# Altium PCB ESP32PCB.PcbDoc (part 2 of 3)
Units mil, origin at the board's own origin, x right, y up, seen from the top; angles counter-clockwise.
Board outline 2685 x 1054.88 mil, 4 copper layers (L1, L2, L3, L4), stack 52.058 mil thick; 64 components, 73 nets, 299 pads, 160 vias.
Unrouted connection lines stored in the file: 2.
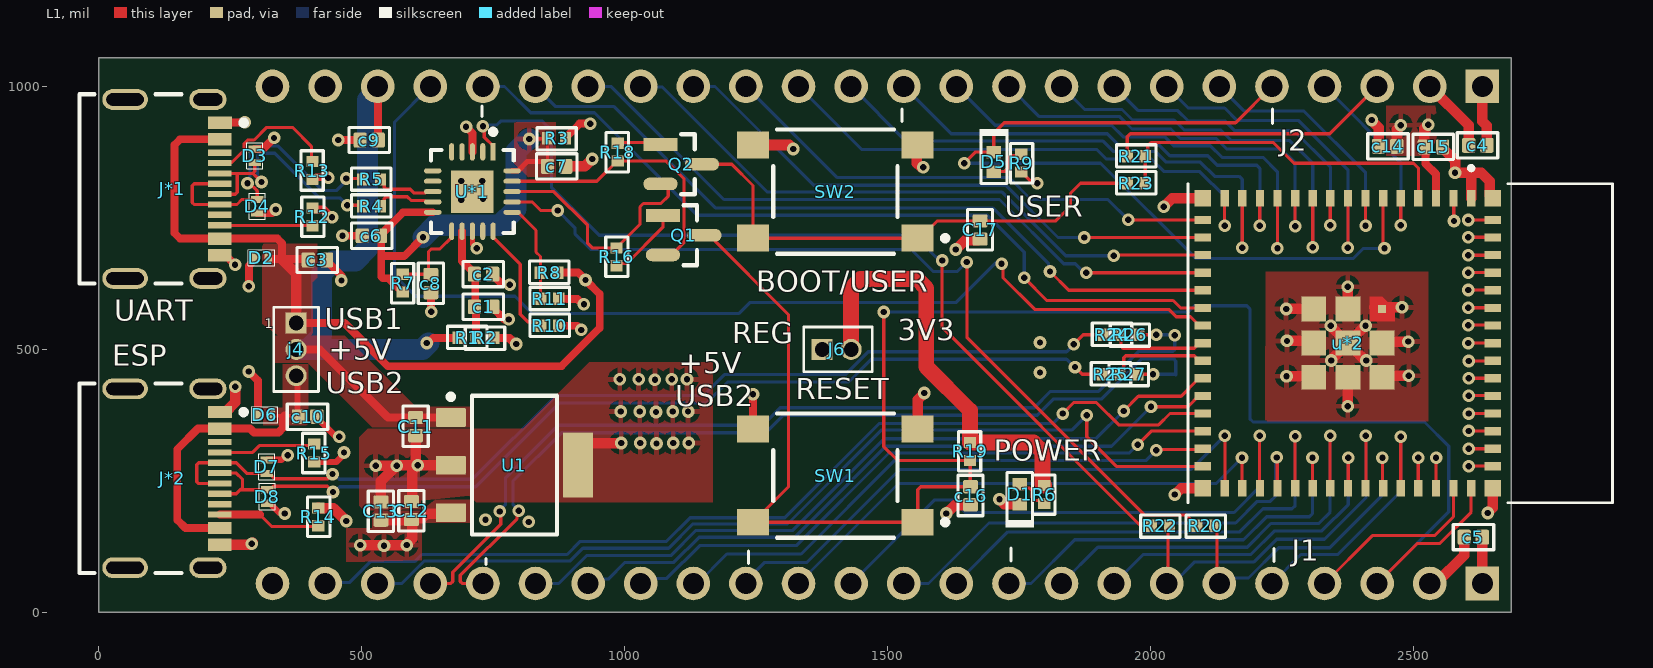
[diagram p0: L1 view]

## Part data (continued)
R6 R9: library part RC0402FR-071KL, "RES 1K OHM 1% 1/16W 0402", Case Code (Imperial)=0402, LCSC Part Number=C106235, Manufacturer="Yageo Group", Max Operating Temperature=155°C, Min Operating Temperature=-55°C, Power Rating=62.5mW, Supplier Part Number=311-1.00KLRDKR-ND, Temperature Coefficient=100ppm/°C, Tolerance=1%, Voltage Rating=50V, Case Code (Metric)=0402, Case/Package=0402, Category="Chip SMD Resistors", China RoHS=Non-Compliant, ComponentLink1Description=https://datasheet.octopart.com:443/RC0402FR-071KL-Yageo-datasheet-175887523.pdf?src-supplier=Newark, ComponentLink1URL=https://datasheet.octopart.com:443/RC0402FR-071KL-Yageo-datasheet-175887523.pdf?src-supplier=Newark, ComponentLink2Description=https://datasheet.octopart.com:443/RC0402FR-071KL-Yageo-datasheet-10408619.pdf?src-supplier=Newark, ComponentLink2URL=https://datasheet.octopart.com:443/RC0402FR-071KL-Yageo-datasheet-10408619.pdf?src-supplier=Newark, ComponentLink3Description=https://datasheet.octopart.com:443/RC0402FR-071KL-Yageo-datasheet-8324527.pdf?src-supplier=Newark, ComponentLink3URL=https://datasheet.octopart.com:443/RC0402FR-071KL-Yageo-datasheet-8324527.pdf?src-supplier=Newark, ComponentLink4Description=https://datasheet.octopart.com:443/RC0402FR-071KL-Yageo-datasheet-164759695.pdf?src-supplier=Upverter, ComponentLink4URL=https://datasheet.octopart.com:443/RC0402FR-071KL-Yageo-datasheet-164759695.pdf?src-supplier=Upverter, ComponentLink5Description=https://datasheet.octopart.com:443/RC0402FR-071KL-Yageo-datasheet-103092701.pdf?src-supplier=Upverter, ComponentLink5URL=https://datasheet.octopart.com:443/RC0402FR-071KL-Yageo-datasheet-103092701.pdf?src-supplier=Upverter, ComponentLink6Description=https://sigma.octopart.com:443/138820526/technical_drawing/Yageo-RC0402FR-071KL.pdf?src-supplier=Upverter, ComponentLink6URL=https://sigma.octopart.com:443/138820526/technical_drawing/Yageo-RC0402FR-071KL.pdf?src-supplier=Upverter, ComponentLink7Description=https://datasheet.octopart.com:443/RC0402FR-071KL-Yageo-datasheet-98239111.pdf?src-supplier=Upverter, ComponentLink7URL=https://datasheet.octopart.com:443/RC0402FR-071KL-Yageo-datasheet-98239111.pdf?src-supplier=Upverter, ComponentLink8Description=https://datasheet.octopart.com:443/RC0402FR-071KL-Yageo-Group-datasheet-190305687.pdf?src-supplier=Future+Electronics, ComponentLink8URL=https://datasheet.octopart.com:443/RC0402FR-071KL-Yageo-Group-datasheet-190305687.pdf?src-supplier=Future+Electronics, ComponentLink9Description=https://datasheet.octopart.com:443/RC0402FR-071KL-Yageo-datasheet-12531192.pdf?src-supplier=Future+Electronics, ComponentLink9URL=https://datasheet.octopart.com:443/RC0402FR-071KL-Yageo-datasheet-12531192.pdf?src-supplier=Future+Electronics, ComponentLink10Description=https://datasheet.octopart.com:443/RC0402FR-071KL-Yageo-datasheet-137700087.pdf?src-supplier=Future+Electronics, ComponentLink10URL=https://datasheet.octopart.com:443/RC0402FR-071KL-Yageo-datasheet-137700087.pdf?src-supplier=Future+Electronics, ComponentLink11Description=https://datasheet.octopart.com:443/RC0402FR-071KL-Yageo-datasheet-8324255.pdf?src-supplier=Future+Electronics, ComponentLink11URL=https://datasheet.octopart.com:443/RC0402FR-071KL-Yageo-datasheet-8324255.pdf?src-supplier=Future+Electronics, ComponentLink12Description=https://datasheet.octopart.com:443/RC0402FR-071KL-Yageo-datasheet-62067350.pdf?src-supplier=Farnell, ComponentLink12URL=https://datasheet.octopart.com:443/RC0402FR-071KL-Yageo-datasheet-62067350.pdf?src-supplier=Farnell, ComponentLink13Description=https://datasheet.octopart.com:443/RC0402FR-071KL-Yageo-datasheet-8329306.pdf?src-supplier=element14, ComponentLink13URL=https://datasheet.octopart.com:443/RC0402FR-071KL-Yageo-datasheet-8329306.pdf?src-supplier=element14, ComponentLink14Description=https://datasheet.octopart.com:443/RC0402FR-071KL-Yageo-datasheet-505231.pdf?src-supplier=element14, ComponentLink14URL=https://datasheet.octopart.com:443/RC0402FR-071KL-Yageo-datasheet-505231.pdf?src-supplier=element14, ComponentLink15Description=https://datasheet.octopart.com:443/RC0402FR-071KL-Yageo-datasheet-175423674.pdf?src-supplier=SOS+electronic, ComponentLink15URL=https://datasheet.octopart.com:443/RC0402FR-071KL-Yageo-datasheet-175423674.pdf?src-supplier=SOS+electronic, ComponentLink16Description=https://datasheet.octopart.com:443/RC0402FR-071KL-Yageo-datasheet-148775077.pdf?src-supplier=TME, ComponentLink16URL=https://datasheet.octopart.com:443/RC0402FR-071KL-Yageo-datasheet-148775077.pdf?src-supplier=TME, ComponentLink17Description=https://datasheet.octopart.com:443/RC0402FR-071KL-Yageo-datasheet-79472498.pdf?src-supplier=Megastar, ComponentLink17URL=https://datasheet.octopart.com:443/RC0402FR-071KL-Yageo-datasheet-79472498.pdf?src-supplier=Megastar, ComponentLink18Description=https://datasheet.octopart.com/RC0402FR-071KL-Yageo-datasheet-73766026.pdf, ComponentLink18URL=https://datasheet.octopart.com/RC0402FR-071KL-Yageo-datasheet-73766026.pdf, ComponentLink19Description=http://sigma.octopart.com:80/conflict_mineral_statement/Yageo-company-3.pdf?src-supplier=Compliance+Statements, ComponentLink19URL=http://sigma.octopart.com:80/conflict_mineral_statement/Yageo-company-3.pdf?src-supplier=Compliance+Statements, ComponentLink20Description=http://sigma.octopart.com:80/rohs_statement/Yageo-company-2.pdf?src-supplier=Compliance+Statements, ComponentLink20URL=http://sigma.octopart.com:80/rohs_statement/Yageo-company-2.pdf?src-supplier=Compliance+Statements, Composition="Thick Film", Contact Plating=Tin, Depth=500µm, Height=350µm, Lead Free="Lead Free", Length=1mm, Lifecycle Status=Production, Manufacturer Part Number=RC0402FR-071KL, Military Standard=Not, Mounting Technology="Surface Mount", Number of Terminals=2, Packaging="Tape & Reel", Pins=2, Pricing="1=0.1, 10=0.021, 25=0.0152, 50=0.012, 100=0.0097, 250=0.0074, 500=0.00612, 1000=0.00512, 5000=0.00355 (USD)", Radiation Hardening=No, REACH SVHC=Yes, RoHS=Compliant, Schedule B="8533210045, 8533210045|8533210045|8533210045|8533210045|8533210045|8533210045|8533210045|8533210045|8533210045|8533210045|8533210045|8533210045|8533210045|8533210045|8533210045|8533210045|8533210045|8533210045|8533210045|8533210045|8533210045|8533210045|8533210045|85", Stock=9104095, Supplier=DigiKey, Termination=SMD/SMT, Voltage Rating (AC)=50V, Voltage Rating (DC)=50V, Width=500µm, Working Voltage=50V
R8: library part RC0402FR-074K7L, "RES 4.7K OHM 1% 1/16W 0402", Case/Package=0402, LCSC Part Number=C105871, Manufacturer=Yageo, Max Operating Temperature=155°C, Min Operating Temperature=-55°C, Package Height=0.35mm, Package Length=1mm, Package Shape=Rectangular, Package Style=SMTMeter, Package Width=0.5mm, Power=62.5mW, Rated Temperature=70°C, Resistor Type="FIXED RESISTOR", Supplier Part Number=311-4.7KLRCT-ND, Temperature Coefficient=100ppm/°C, Tolerance=1%, Working Voltage=50V, Additional Feature="LASER TRIMMABLE", Category="Chip SMD Resistors", ComponentLink1Description=https://datasheet.ciiva.com:443/pdfs/VipMasterIC/IC/YAGO/YAGO-S-A0008145938/YAGO-S-A0008145938-1.pdf?src-supplier=IHS+Markit, ComponentLink1URL=https://datasheet.ciiva.com:443/pdfs/VipMasterIC/IC/YAGO/YAGO-S-A0008145938/YAGO-S-A0008145938-1.pdf?src-supplier=IHS+Markit, ComponentLink2Description=https://datasheet.ciiva.com/22661/1686128-22661342.pdf?src-supplier=Element14, ComponentLink2URL=https://datasheet.ciiva.com/22661/1686128-22661342.pdf?src-supplier=Element14, ComponentLink3Description=https://datasheet.ciiva.com/7850/1018594-7850022.pdf?src-supplier=Element14, ComponentLink3URL=https://datasheet.ciiva.com/7850/1018594-7850022.pdf?src-supplier=Element14, ComponentLink4Description=https://datasheet.ciiva.com/7850/1018594-7850023.pdf?src-supplier=Element14, ComponentLink4URL=https://datasheet.ciiva.com/7850/1018594-7850023.pdf?src-supplier=Element14, ComponentLink5Description=https://datasheet.ciiva.com/15215/getdatasheetpartid-328119-15215035.pdf?src-supplier=Verical, ComponentLink5URL=https://datasheet.ciiva.com/15215/getdatasheetpartid-328119-15215035.pdf?src-supplier=Verical, Construction=Chip, JESD-609 Code=e3, Manufacturer Part Number=RC0402FR-074K7L, Mounting Technology="Surface Mount", Packaging="Tape and Reel", Pins=2, Pricing="1=0.1, 10=0.015, 50=0.0088, 100=0.0073, 500=0.00488, 1000=0.00417, 5000=0.00297 (USD)", Reach SVHC Compliant=Yes, RoHS=Yes, RoHS Compliant=Yes, Stock=9886878, Supplier=Digikey, Technology="METAL GLAZE/THICK FILM", Terminal Finish=Nickel, Termination=Wraparound
R10 R11 R16 R18 R19: library part AC0402FR-0710KL, "RES SMD 10K OHM 1% 1/16W 0402", Case Code (Imperial)=0402, Case Code (Metric)=1005, LCSC Part Number=C144807, Manufacturer="Yageo Group", Max Operating Temperature=155°C, Max Power Dissipation=63mW, Min Operating Temperature=-55°C, Power Rating=62.5mW, Ratings=AEC-Q200, Supplier Part Number=YAG3436CT-ND, Temperature Coefficient=100ppm/°C, Tolerance=1%, Voltage Rating=50V, Case/Package=0402, Category="Chip SMD Resistors", China RoHS=Non-Compliant, ComponentLink1Description=https://datasheet.octopart.com:443/AC0402FR-0710KL-Yageo-datasheet-182189377.pdf?src-supplier=IHS, ComponentLink1URL=https://datasheet.octopart.com:443/AC0402FR-0710KL-Yageo-datasheet-182189377.pdf?src-supplier=IHS, ComponentLink2Description=https://datasheet.octopart.com:443/AC0402FR-0710KL-Yageo-datasheet-83209224.pdf?src-supplier=Upverter, ComponentLink2URL=https://datasheet.octopart.com:443/AC0402FR-0710KL-Yageo-datasheet-83209224.pdf?src-supplier=Upverter, ComponentLink3Description=https://datasheet.octopart.com:443/AC0402FR-0710KL-Yageo-datasheet-178509465.pdf?src-supplier=Newark, ComponentLink3URL=https://datasheet.octopart.com:443/AC0402FR-0710KL-Yageo-datasheet-178509465.pdf?src-supplier=Newark, ComponentLink4Description=https://datasheet.octopart.com:443/AC0402FR-0710KL-Yageo-datasheet-166720450.pdf?src-supplier=JRH+Electronics, ComponentLink4URL=https://datasheet.octopart.com:443/AC0402FR-0710KL-Yageo-datasheet-166720450.pdf?src-supplier=JRH+Electronics, ComponentLink5Description=https://datasheet.octopart.com:443/AC0402FR-0710KL-Yageo-datasheet-151884373.pdf?src-supplier=Future+Electronics, ComponentLink5URL=https://datasheet.octopart.com:443/AC0402FR-0710KL-Yageo-datasheet-151884373.pdf?src-supplier=Future+Electronics, ComponentLink6Description=https://datasheet.octopart.com:443/AC0402FR-0710KL-Yageo-Group-datasheet-189830439.pdf?src-supplier=Future+Electronics, ComponentLink6URL=https://datasheet.octopart.com:443/AC0402FR-0710KL-Yageo-Group-datasheet-189830439.pdf?src-supplier=Future+Electronics, ComponentLink7Description=https://datasheet.octopart.com:443/AC0402FR-0710KL-Yageo-datasheet-137699919.pdf?src-supplier=Future+Electronics, ComponentLink7URL=https://datasheet.octopart.com:443/AC0402FR-0710KL-Yageo-datasheet-137699919.pdf?src-supplier=Future+Electronics, ComponentLink8Description=https://datasheet.octopart.com:443/AC0402FR-0710KL-Yageo-datasheet-24580492.pdf?src-supplier=Future+Electronics, ComponentLink8URL=https://datasheet.octopart.com:443/AC0402FR-0710KL-Yageo-datasheet-24580492.pdf?src-supplier=Future+Electronics, ComponentLink9Description=https://datasheet.octopart.com:443/AC0402FR-0710KL-Yageo-datasheet-13029202.pdf?src-supplier=Future+Electronics, ComponentLink9URL=https://datasheet.octopart.com:443/AC0402FR-0710KL-Yageo-datasheet-13029202.pdf?src-supplier=Future+Electronics, ComponentLink10Description=https://datasheet.octopart.com/AC0402FR-0710KL-Yageo-datasheet-12512238.pdf, ComponentLink10URL=https://datasheet.octopart.com/AC0402FR-0710KL-Yageo-datasheet-12512238.pdf, ComponentLink11Description=https://datasheet.octopart.com:443/AC0402FR-0710KL-Yageo-Group-datasheet-164768995.pdf?src-supplier=ODG+(Origin+Data+Global), ComponentLink11URL=https://datasheet.octopart.com:443/AC0402FR-0710KL-Yageo-Group-datasheet-164768995.pdf?src-supplier=ODG+(Origin+Data+Global), ComponentLink12Description=https://datasheet.octopart.com:443/AC0402FR-0710KL-Yageo-datasheet-128677448.pdf?src-supplier=X-ON, ComponentLink12URL=https://datasheet.octopart.com:443/AC0402FR-0710KL-Yageo-datasheet-128677448.pdf?src-supplier=X-ON, ComponentLink13Description=http://sigma.octopart.com:80/conflict_mineral_statement/Yageo-company-3.pdf?src-supplier=Compliance+Statements, ComponentLink13URL=http://sigma.octopart.com:80/conflict_mineral_statement/Yageo-company-3.pdf?src-supplier=Compliance+Statements, ComponentLink14Description=http://sigma.octopart.com:80/rohs_statement/Yageo-company-2.pdf?src-supplier=Compliance+Statements, ComponentLink14URL=http://sigma.octopart.com:80/rohs_statement/Yageo-company-2.pdf?src-supplier=Compliance+Statements, Composition="Thick Film", Country of Origin="Mainland China, Taiwan", Depth=500µm, Export Control Classification Number (ECCN) Code=EAR99, Features="Automotive AEC-Q200, Moisture Resistant", Harmonized Tariff Schedule (HTS) Code=8533.21.00.30, Height=320µm, Introduction Date=2012-04-10, Lead Free="Lead Free", Length=1mm, Lifecycle Status=Production, Manufacturer Part Number=AC0402FR-0710KL, Military Standard=Not, Mounting Technology="Surface Mount", Number of Terminals=2, Number of Terminations=2, Packaging="Tape & Reel", Pricing="1=0.1, 10=0.024, 25=0.0176, 50=0.014, 100=0.0114, 250=0.00876, 500=0.00726, 1000=0.00612, 5000=0.00431 (USD)", REACH SVHC=Yes, RoHS=Compliant, Schedule B="8533210045, 8533210045|8533210045|8533210045|8533210045|8533210045|8533210045|8533210045|8533210045|8533210045|8533210045|8533210045|8533210045|8533210045|8533210045|8533210045|8533210045|8533210045|8533210045|8533210045, 8533210045|8533210045|8533210045|8533210045|8533210045|8533210045|8533210045|8533210045|8533210045|8533210045|8533210045|8533210045|8533210045|8533210045|8533210045|8533210045|8533210045|8533210045|8533210045|8533210045|8533210045|8533210045|8533210045|85", Stock=147026, Supplier=DigiKey, Termination=SMD/SMT, Width=500µm, Working Voltage=50V
R12 R13 R14 R15: library part AC0402FR-135K1L, "Res Thick Film 0402 5.1K Ohm 1% 0.063W(1/16W) ±100ppm/°C Pad SMD T/R Automotive AEC-Q200", Case/Package=0402, LCSC Part Number=C226739, Manufacturer="Yageo Group", Max Operating Temperature=155°C, Min Operating Temperature=-55°C, Power Rating=62.5mW, Ratings=AEC-Q200, Supplier Part Number=13-AC0402FR-135K1LDKR-ND, Temperature Coefficient=100ppm/°C, Tolerance=1%, Voltage Rating=50V, Category="Chip SMD Resistors", China RoHS=Non-Compliant, ComponentLink1Description=https://datasheet.octopart.com:443/AC0402FR-135K1L-Yageo-datasheet-182189377.pdf?src-supplier=IHS, ComponentLink1URL=https://datasheet.octopart.com:443/AC0402FR-135K1L-Yageo-datasheet-182189377.pdf?src-supplier=IHS, ComponentLink2Description=https://datasheet.octopart.com:443/AC0402FR-135K1L-Yageo-datasheet-83209224.pdf?src-supplier=Upverter, ComponentLink2URL=https://datasheet.octopart.com:443/AC0402FR-135K1L-Yageo-datasheet-83209224.pdf?src-supplier=Upverter, ComponentLink3Description=https://datasheet.octopart.com:443/AC0402FR-135K1L-Yageo-Group-datasheet-189830439.pdf?src-supplier=Future+Electronics, ComponentLink3URL=https://datasheet.octopart.com:443/AC0402FR-135K1L-Yageo-Group-datasheet-189830439.pdf?src-supplier=Future+Electronics, ComponentLink4Description=https://datasheet.octopart.com:443/AC0402FR-135K1L-Yageo-datasheet-166720450.pdf?src-supplier=Future+Electronics, ComponentLink4URL=https://datasheet.octopart.com:443/AC0402FR-135K1L-Yageo-datasheet-166720450.pdf?src-supplier=Future+Electronics, ComponentLink5Description=https://datasheet.octopart.com:443/AC0402FR-135K1L-Yageo-datasheet-164768995.pdf?src-supplier=Future+Electronics, ComponentLink5URL=https://datasheet.octopart.com:443/AC0402FR-135K1L-Yageo-datasheet-164768995.pdf?src-supplier=Future+Electronics, ComponentLink6Description=https://datasheet.octopart.com/AC0402FR-135K1L-Yageo-datasheet-12512238.pdf, ComponentLink6URL=https://datasheet.octopart.com/AC0402FR-135K1L-Yageo-datasheet-12512238.pdf, ComponentLink7Description=http://sigma.octopart.com:80/conflict_mineral_statement/Yageo-company-3.pdf?src-supplier=Compliance+Statements, ComponentLink7URL=http://sigma.octopart.com:80/conflict_mineral_statement/Yageo-company-3.pdf?src-supplier=Compliance+Statements, ComponentLink8Description=http://sigma.octopart.com:80/rohs_statement/Yageo-company-2.pdf?src-supplier=Compliance+Statements, ComponentLink8URL=http://sigma.octopart.com:80/rohs_statement/Yageo-company-2.pdf?src-supplier=Compliance+Statements, Composition="Thick Film", Country of Origin="Mainland China, Taiwan", Export Control Classification Number (ECCN) Code=EAR99, Harmonized Tariff Schedule (HTS) Code=8533.21.00.30, Height=320µm, Introduction Date=2012-04-10, Length=1mm, Lifecycle Status=Production, Manufacturer Part Number=AC0402FR-135K1L, Mounting Technology="Surface Mount", Number of Terminals=2, Packaging="Tape & Reel", Pricing="1=0.1, 10=0.024, 25=0.0176, 50=0.014, 100=0.0114, 250=0.00876, 500=0.00726, 1000=0.00612, 5000=0.00431 (USD)", REACH SVHC=Yes, RoHS=Compliant, Stock=116046, Supplier=DigiKey, Width=500µm, Working Voltage=50V
SW1 SW2: "SWITCH TACTILE SPST-NO 0.05A 12V", Case/Package=SMD/SMT, Color=Black, Contact Current Rating=50mA, Contact Resistance=100mΩ, Insulation Resistance=100GΩ, LCSC Part Number=C221869, Manufacturer="C&K Components", Max Operating Temperature=60°C, Max Voltage Rating (DC)=12V, Min Operating Temperature=-20°C, Operating Force=1.96N, Supplier Part Number=CKN9085CT-ND, Actuator Material="Nylon, Polyamide", Category="Tactile Switches", ComponentLink1Description=https://datasheet.octopart.com:443/PTS645SH50SMTR92LFS-C%26K-Components-datasheet-169841344.pdf?src-supplier=Farnell, ComponentLink1URL=https://datasheet.octopart.com:443/PTS645SH50SMTR92LFS-C%26K-Components-datasheet-169841344.pdf?src-supplier=Farnell, ComponentLink2Description=https://datasheet.octopart.com:443/PTS645SH50SMTR92LFS-C%26K-Components-datasheet-165782998.pdf?src-supplier=Farnell, ComponentLink2URL=https://datasheet.octopart.com:443/PTS645SH50SMTR92LFS-C%26K-Components-datasheet-165782998.pdf?src-supplier=Farnell, ComponentLink3Description=https://datasheet.octopart.com:443/PTS645SH50SMTR92LFS-C%26K-Components-datasheet-67873720.pdf?src-supplier=Upverter, ComponentLink3URL=https://datasheet.octopart.com:443/PTS645SH50SMTR92LFS-C%26K-Components-datasheet-67873720.pdf?src-supplier=Upverter, ComponentLink4Description=https://datasheet.octopart.com:443/PTS645SH50SMTR92-LFS-C%26K-Components-datasheet-141421486.pdf?src-supplier=Upverter, ComponentLink4URL=https://datasheet.octopart.com:443/PTS645SH50SMTR92-LFS-C%26K-Components-datasheet-141421486.pdf?src-supplier=Upverter, ComponentLink5Description=https://datasheet.octopart.com:443/PTS645SH50SMTR92-LFS-C%26K-Components-datasheet-110647872.pdf?src-supplier=TME, ComponentLink5URL=https://datasheet.octopart.com:443/PTS645SH50SMTR92-LFS-C%26K-Components-datasheet-110647872.pdf?src-supplier=TME, ComponentLink6Description=https://datasheet.octopart.com:443/PTS645SH50SMTR-92-LFS-C%26K-Components-datasheet-150821959.pdf?src-supplier=TME, ComponentLink6URL=https://datasheet.octopart.com:443/PTS645SH50SMTR-92-LFS-C%26K-Components-datasheet-150821959.pdf?src-supplier=TME, ComponentLink7Description=https://datasheet.octopart.com:443/PTS645SH50SMTR92LFS-C%26K-Components-datasheet-138128951.pdf?src-supplier=Future+Electronics, ComponentLink7URL=https://datasheet.octopart.com:443/PTS645SH50SMTR92LFS-C%26K-Components-datasheet-138128951.pdf?src-supplier=Future+Electronics, ComponentLink8Description=https://datasheet.octopart.com:443/PTS645SH50SMTR92LFS-C%26K-Components-datasheet-62111174.pdf?src-supplier=Future+Electronics, ComponentLink8URL=https://datasheet.octopart.com:443/PTS645SH50SMTR92LFS-C%26K-Components-datasheet-62111174.pdf?src-supplier=Future+Electronics, ComponentLink9Description=https://datasheet.octopart.com:443/PTS645SH50SMTR92LFS-C%26K-Components-datasheet-24578962.pdf?src-supplier=Future+Electronics, ComponentLink9URL=https://datasheet.octopart.com:443/PTS645SH50SMTR92LFS-C%26K-Components-datasheet-24578962.pdf?src-supplier=Future+Electronics, ComponentLink10Description=https://datasheet.octopart.com:443/PTS645SH50SMTR92-LFS-C%26K-Components-datasheet-12590747.pdf?src-supplier=Future+Electronics, ComponentLink10URL=https://datasheet.octopart.com:443/PTS645SH50SMTR92-LFS-C%26K-Components-datasheet-12590747.pdf?src-supplier=Future+Electronics, Contact Material=Bronze, Contact Plating=Silver, Country of Origin="Mainland China", Current Rating=50mA, Depth=9mm, Electrical Life=100kcycles, Export Control Classification Number (ECCN) Code=EAR99, Harmonized Tariff Schedule (HTS) Code=8536.50.90.40, Height=3.4544mm, Illumination Type="Illuminated, Non-Illuminated", Introduction Date=2013-05-01, Lead Free="Lead Free", Length=6mm, Life (Cycles)=100kcycles, Lifecycle Status=Production, Manufacturer Part Number=PTS645SH50SMTR92LFS, Max Current Rating=50mA, Mechanical Life=100kcycles, Mounting Technology="Surface Mount", Number of Positions=1, Orientation=Straight, Packaging="Tape & Reel (TR)", Pricing="1=0.36, 10=0.312, 25=0.2912, 100=0.2606, 250=0.24148, 500=0.2279 (USD)", REACH SVHC=Yes, RoHS=Compliant, Stock=46479, Supplier=DigiKey, Switch Function=Off-Mom, Termination="Gull Wing", Throw Configuration=SPST, Voltage Rating (DC)=12V
U1: "IC REG LIN 3.3V 1.5A SOT-223-4", Case/Package=SOT-223, Dropout Voltage=340mV, Input Bias Current=1mA, LCSC Part Number=C181262, Manufacturer="Texas Instruments", Manufacturer Lifecycle Status=ACTIVE, Max Operating Temperature=125°C, Max Output current=1.5A, Max Output Voltage=3.3V, Max Supply Voltage=20V, Min Current Limit=1.6A, Min Input Voltage=2.1V, Min Operating Temperature=-40°C, Supplier Part Number=296-24897-1-ND, Accuracy=3%, Category="LDO Voltage Regulators", ComponentLink1Description=https://datasheet.octopart.com:443/TL1963A-33DCYR-Texas-Instruments-datasheet-36835243.pdf?src-supplier=Texas+Instruments, ComponentLink1URL=https://datasheet.octopart.com:443/TL1963A-33DCYR-Texas-Instruments-datasheet-36835243.pdf?src-supplier=Texas+Instruments, ComponentLink2Description=https://octopart.com:443/opatz8j6/c1?t=FTrSVOfP93nAUGvhjd3lhUGXAEiGpl01rJ-ejAqOdcBDFpYGu16XhNrkZ_g2C1wXYKFanKCfwKRpWqlBzC_IHFKOGMjjJUz2d1twI7R59KZfH-bxvJsXWw8-WulKPBbWwnOyaMw2-C-0Sp5V4W6xJGBv4vK90Jv7smY0K_a7ljXNSAI5u-7HaSWygK100XGEoHxm-1Tumi5wx4eug8BBO_Pe_nHVi4GorIiLyPu5vhCD6EzPrS-RGOe1pMk-F4S1gCCkV4ICNxEwYq2RWn6io-0ATlLiT5xzDyADfsSG4dajJZfl1C1Okxj7teHxMQUy64jRct2yicJxlEVSLY6XZqKQmY9qnFKjTONJcbedCy28GSU6Pz2CwzNsodNFiDHj97FWGx4&src-supplier=Texas+Instruments, ComponentLink2URL=https://octopart.com:443/opatz8j6/c1?t=FTrSVOfP93nAUGvhjd3lhUGXAEiGpl01rJ-ejAqOdcBDFpYGu16XhNrkZ_g2C1wXYKFanKCfwKRpWqlBzC_IHFKOGMjjJUz2d1twI7R59KZfH-bxvJsXWw8-WulKPBbWwnOyaMw2-C-0Sp5V4W6xJGBv4vK90Jv7smY0K_a7ljXNSAI5u-7HaSWygK100XGEoHxm-1Tumi5wx4eug8BBO_Pe_nHVi4GorIiLyPu5vhCD6EzPrS-RGOe1pMk-F4S1gCCkV4ICNxEwYq2RWn6io-0ATlLiT5xzDyADfsSG4dajJZfl1C1Okxj7teHxMQUy64jRct2yicJxlEVSLY6XZqKQmY9qnFKjTONJcbedCy28GSU6Pz2CwzNsodNFiDHj97FWGx4&src-supplier=Texas+Instruments, ComponentLink3Description=https://datasheet.octopart.com:443/TL1963A-33DCYR-Texas-Instruments-datasheet-10255270.pdf?src-supplier=Texas+Instruments, ComponentLink3URL=https://datasheet.octopart.com:443/TL1963A-33DCYR-Texas-Instruments-datasheet-10255270.pdf?src-supplier=Texas+Instruments, ComponentLink4Description=https://sigma.octopart.com:443/49253063/technical_drawing/Texas-Instruments-TL1963A-33DCYR.pdf?src-supplier=Texas+Instruments, ComponentLink4URL=https://sigma.octopart.com:443/49253063/technical_drawing/Texas-Instruments-TL1963A-33DCYR.pdf?src-supplier=Texas+Instruments, ComponentLink5Description=https://datasheet.octopart.com:443/TL1963A-33DCYR-Texas-Instruments-datasheet-159117591.pdf?src-supplier=Augswan, ComponentLink5URL=https://datasheet.octopart.com:443/TL1963A-33DCYR-Texas-Instruments-datasheet-159117591.pdf?src-supplier=Augswan, ComponentLink6Description=https://datasheet.octopart.com:443/TL1963A-33DCYR-Texas-Instruments-datasheet-21820479.pdf?src-supplier=Newark, ComponentLink6URL=https://datasheet.octopart.com:443/TL1963A-33DCYR-Texas-Instruments-datasheet-21820479.pdf?src-supplier=Newark, ComponentLink7Description=https://datasheet.octopart.com:443/TL1963A-33DCYR-Texas-Instruments-datasheet-16079880.pdf?src-supplier=Farnell, ComponentLink7URL=https://datasheet.octopart.com:443/TL1963A-33DCYR-Texas-Instruments-datasheet-16079880.pdf?src-supplier=Farnell, ComponentLink8Description=https://datasheet.octopart.com:443/TL1963A-33DCYR-Texas-Instruments-datasheet-14171511.pdf?src-supplier=iiiC, ComponentLink8URL=https://datasheet.octopart.com:443/TL1963A-33DCYR-Texas-Instruments-datasheet-14171511.pdf?src-supplier=iiiC, ComponentLink9Description=http://sigma.octopart.com:80/conflict_mineral_statement/Texas-Instruments-company-63.pdf?src-supplier=Compliance+Statements, ComponentLink9URL=http://sigma.octopart.com:80/conflict_mineral_statement/Texas-Instruments-company-63.pdf?src-supplier=Compliance+Statements, ComponentLink10Description=http://sigma.octopart.com:80/reach_statement/Texas-Instruments-company-64.pdf?src-supplier=Compliance+Statements, ComponentLink10URL=http://sigma.octopart.com:80/reach_statement/Texas-Instruments-company-64.pdf?src-supplier=Compliance+Statements, Contact Plating=Tin, Height=1.8mm, Lead Free="Lead Free", Length=6.5mm, Lifecycle Status=Production, Manufacturer Part Number=TL1963A-33DCYR, Min Output Voltage=3.3V, Nominal Output Voltage=3.3V, Number of Outputs=1, Number of Regulators=1, Output Current=1.5A, Output Type=Fixed, Output Voltage=3.3V, Pins=4, Polarity=Positive, Pricing="1=3.22, 10=2.414, 25=2.212, 100=1.9903, 250=1.88444, 500=1.85588 (USD)", Quiescent Current=1mA, Radiation Hardening=No, REACH SVHC=No, RoHS=Compliant, Schedule B="8542390000, 8542390000|8542390000|8542390000|8542390000|8542390000", Stock=3442, Supplier=DigiKey, Thickness=1.6mm, Width=3.5mm
U*1: "IC USB SERIAL FULL UART 20QFN", Ambient Temperature Range High=85°C, Case/Package=QFN, LCSC Part Number=C132159, Manufacturer=FTDI, Max Supply Current=8.4mA, Max Supply Voltage=5.5V, Min Operating Temperature=-40°C, Min Supply Voltage=2.97V, Nominal Supply Voltage (DC)=5V, Operating Supply Current=8mA, Supplier Part Number=768-1128-6-ND, Category="UART Interface ICs", ComponentLink1Description=https://datasheet.octopart.com:443/FT231XQ-R-FTDI-datasheet-182343132.pdf?src-supplier=IHS, ComponentLink1URL=https://datasheet.octopart.com:443/FT231XQ-R-FTDI-datasheet-182343132.pdf?src-supplier=IHS, ComponentLink2Description=https://datasheet.octopart.com:443/FT231XQ-R-FTDI-datasheet-11021087.pdf?src-supplier=HQonline, ComponentLink2URL=https://datasheet.octopart.com:443/FT231XQ-R-FTDI-datasheet-11021087.pdf?src-supplier=HQonline, ComponentLink3Description=https://datasheet.octopart.com:443/FT231XQ-R-FTDI-datasheet-28834672.pdf?src-supplier=SOS+electronic, ComponentLink3URL=https://datasheet.octopart.com:443/FT231XQ-R-FTDI-datasheet-28834672.pdf?src-supplier=SOS+electronic, ComponentLink4Description=https://datasheet.octopart.com:443/FT231XQ-R-FTDI-datasheet-68321328.pdf?src-supplier=TME, ComponentLink4URL=https://datasheet.octopart.com:443/FT231XQ-R-FTDI-datasheet-68321328.pdf?src-supplier=TME, ComponentLink5Description=https://datasheet.octopart.com:443/FT231XQ-R-FTDI-datasheet-134530624.pdf?src-supplier=SHENGYU+ELECTRONICS, ComponentLink5URL=https://datasheet.octopart.com:443/FT231XQ-R-FTDI-datasheet-134530624.pdf?src-supplier=SHENGYU+ELECTRONICS, Data Rate=12Mbps, Height=800µm, Height - Seated (Max)=800µm, Interface="UART, USB", Lead Free="Lead Free", Length=4mm, Lifecycle Status=Production, Manufacturer Part Number=FT231XQ-R, Max Operating Temperature=85°C, Mounting Technology="Surface Mount", Number of Channels=1, Number of Terminals=20, Pins=20, Pricing="1=2.34, 25=2.27, 100=2.2, 250=2.15728 (USD)", REACH SVHC=Yes, RoHS=Compliant, Supplier=DigiKey, Terminal Pitch=500µm, Weight=123.008581mg, Width=4mm
u*2: "SMD module, ESP32-S3FN8, 8 MB SPI flash, PCB antenna", LCSC Part Number=C2913206, Manufacturer="Espressif Systems", Supplier Part Number=5407-ESP32-S3-MINI-1-N8CT-ND, Category="RF Transceiver Modules and Modems", ComponentLink1Description=https://datasheet.octopart.com:443/ESP32-S3-MINI-1-N8-Espressif-Systems-datasheet-188867343.pdf?src-supplier=TME, ComponentLink1URL=https://datasheet.octopart.com:443/ESP32-S3-MINI-1-N8-Espressif-Systems-datasheet-188867343.pdf?src-supplier=TME, ComponentLink2Description=https://datasheet.octopart.com:443/ESP32-S3-MINI-1-N8-Espressif-Systems-datasheet-165560562.pdf?src-supplier=TME, ComponentLink2URL=https://datasheet.octopart.com:443/ESP32-S3-MINI-1-N8-Espressif-Systems-datasheet-165560562.pdf?src-supplier=TME, ComponentLink3Description=https://datasheet.octopart.com:443/ESP32-S3-MINI-1-N8-Espressif-Systems-datasheet-165560559.pdf?src-supplier=TME, ComponentLink3URL=https://datasheet.octopart.com:443/ESP32-S3-MINI-1-N8-Espressif-Systems-datasheet-165560559.pdf?src-supplier=TME, ComponentLink4Description=https://datasheet.octopart.com:443/ESP32-S3-MINI-1-N8-Espressif-Systems-datasheet-192318068.pdf?src-supplier=HQonline, ComponentLink4URL=https://datasheet.octopart.com:443/ESP32-S3-MINI-1-N8-Espressif-Systems-datasheet-192318068.pdf?src-supplier=HQonline, Manufacturer Part Number=ESP32-S3-MINI-1-N8, Pricing="1=5.43, 10=4.703, 25=4.4492, 100=4.0995, 250=3.89008, 650=3.68846, 1300=3.55221, 1950=3.47622 (USD)", RoHS=Compliant, Stock=6044, Supplier=DigiKey

## Via types
v1: diameter 24, hole 12, L1 to L4, tented both sides, 160 vias

## Nets (pads, with @x,y where several pads share a name; then routed paths per layer and width w, separated by ;. In a path a pad name is that pad's centre, name@x,y a point inside that pad or via, vN(x,y) a via of type N, cw(c..) or ccw(c..) an arc to the next point about the centre after c; other vN are vias at no path point)
+3V3: c4.2 c5.2 c14.2 c15.2 J1.1 J2.2 J6.2 R2.1 R3.1 R6.2 R9.2 R19.2 u*2.3 | length 5069.6
  L1 w6: R9.2 1754.54,837 1775.54,816 v1(1784,816)
  L1 w15: R2.1 781,522 784,519 782.3,519 791.05,510.25 v1(793.48,510.25) ; R3.1@887.15,901.14 887.15,902.32 913.97,929.14 v1(934.13,929.14) ; c15.2@2522.03,882.4 2522.03,852.97 2541.73,833.27 u*2.3
  L1 w20: c14.2 2467.28,917.2 2475,924.92 v1(2475,926) ; 2519.28,917 2519.28,885.43 c15.2 ; v1@2519.57,919.2 v1(2527.28,926.92) ; J2.2@2529.5,1000.5 2604,926 c4.2 ; J1.1 c5.2
  L1 w30: J6.2 1430,616.43 1447.57,634 1555.43,634 1573,616.43 1573,467 1656,384 R19.2 1776.43,323.02 1794,305.44 1794,244 R6.2
  L2 w20: 2437.12,895.61 2437.39,895.61 2541,792 2541,553 2576,518 2576,205 2630,151 J1.1 ; v1(2475,926) 2529,926 2532.92,929.92 v1@2534,929.92
  L2 w30: J6.2 1430,782 1430,783
  L2 w40: v1@797,510 834,547 834,622 777,679 777,913.57 800.43,937 926.28,937 v1(934.13,929.14) 945.99,941 1101,941 1259,783 1430,783 ; 1419.48,782 1430,782 1750,782 v1(1784,816) 1847,879 2437.12,879 ; 2437.39,895.61 2447.86,895.61 2448.13,895.88 2505.57,895.88 2534,924.31 2534,929.92 2534,996 J2.2
+3V3_FTDI: c6.2 c7.1 R3.2 R7.1 U*1.10 U*1.20 | length 855.4
  L1 w6: v1(818,900) 818.5,900.5 852.49,900.5 R3.2 ; c7.1 852.86,848.14 R3.2@852.86,900.86
  L1 w10.01: U*1.20 796.71,839.37 814.34,857 845.12,857 852.72,849.41 c7.1
  L1 w15: R7.1 574.87,612.13 573.69,612.13 550.54,635.28 539.72,635.28 536.64,638.36 536.64,677.29 ; v1(616,713) 580.29,677.29 536.64,677.29 ; U*1.10 578.34,760.63 535.28,717.57 536.64,716.22 536.64,677.29
  L4 w40: v1(616,713) 639,736 762,736 793,767 793,876 817,900 v1(818,900)
+3V3_REG: C12.2 C13.2 J6.1 U1.3 | length 1219.1
  L1 w20: v1@498.08,128 539.92,128 540.92,127 v1(542,127) ; C13.2 585.77,175.43 593,175.43 C12.2@591.43,175.43 ; v1@542,128 v1(585,128) 585,129.08 596,140.08 C12.2@596,176.43 ; C12.2@598.17,178.03 598.17,179.03 614.03,179.03 622.92,187.92 667.41,187.92 U1.3
  L2 w40: v1(585,128) 1003,128 J6.1
  other v1: 497,128
+5V: c9.2 C11.2 J2.22 j4.2 R1.1 U1.1 | length 1349.7
  L1 w15: j4.2 420,500 549.43,370.57 C11.2 U1.1 ; J2.22 530.5,999.5 530.5,898.5 c9.2 ; v1(623.48,512.25) 625.92,512.25 635.67,522 R1.1
  L4 w40: j4.2 397,500 ; J2.22 530,993.51 511,974.51 511,691.43 487.57,668 446.43,668 423,644.57 423,526 397,500 ; v1@627,512 615,500 397,500
+5V_VBUS1: c3.2 D2.2 j4.1 J*1.A4B9 J*1.B4A9 R8.2 | length 1513.8
  L1 w15: J*1.A4B9 154.49,899.49 144,889 144,721 154.49,710.51 J*1.B4A9 339.21,710.51 348,701.73 348,673 347,672 ; D2.2 321.8,672.61 322.41,672 347,672 ; j4.1 467,550 549,468 879.11,468 952,540.89 952,605 v1(925,632) 911,646 R8.2 ; c3.2 396,672 347,672
  L1 w20: 347,672 375,644 j4.1
+5V_VBUS2: c10.2 D6.2 j4.3 J*2.A4B9 J*2.B4A9 | length 604
  L1 w6: D6.2@328.61,374 353.16,374 c10.2@377.72,374
  L1 w12: c10.2@377.36,374.36 j4.3@377.36,447.64
  L1 w15: J*2.B4A9 164.49,160.51 149,176 149,310 188.49,349.49 J*2.A4B9 287.2,349.49 294.69,342 341.21,342 350,350.79 350,370.84 353.16,374 ; D6.2 328,374.61 D6.2@328.61,374 ; j4.3 j4.3@377.36,447.64 ; c10.2@377.36,374.36 c10.2 c10.2@377.72,374
+VCC_FTDI: c1.2 c2.2 R1.2 R2.2 U*1.12 | length 214.3
  L1 w15: U*1.12 690.31,668.26 714,644.57 c2.2 715.5,641.5 c1.2@715.5,581 ; c1.2 716.98,578.02 R1.2
BTN_GPIO0: C17.2 Q2.3 R23.1 SW2.1 SW2.2 | length 983.4
  L1 w6: Q2.3 1203,852 1243.5,811.5 SW2.2 SW2.1 1561.42,711.42 1594.28,744.28 C17.2 1819.28,744.28 1847,772 1847,797 1866,816 R23.1
CHIP_PU: c16.2 J1.3 Q1.3 R19.1 SW1.1 SW1.2 u*2.45 | length 3513.7
  L1 w6: Q1.3 1160.06,717 1311,566.06 1311,238.91 SW1.2 SW1.1 1556.5,233.14 1562.35,239 c16.2 1656.5,239.5 1656.5,288.5 R19.1 1518.11,289 1491.98,315.13 v1(1491.98,570.98) ; J1.3 2506,131 2549,131 2608.66,190.66 u*2.45
  L4 w6: v1(1491.98,570.98) 2070.95,570.98 2082.83,582.86 2182.14,582.86 2188,577 2188,367.86 2193.86,362 2520,362 2566,316 2566,191 J1.3
CON1_USB_N: D3.2 J*1.A7 J*1.B7 R4.1 | length 475.4
  L1 w6.23: J*1.A7 259.35,795.16 263,798.81 263,834.46 262.93,834.53 ; J*1.B7 262.93,834.53 ; D3.2 296.38,854.82 296.38,838.18 292.73,834.53 ; v1(309.13,818.13) 292.73,834.53 ; v1(472,774) 498.98,774 R4.1 ; 262.93,834.53 292.73,834.53
  L4 w6.23: v1(309.13,818.13) 309.13,822.94 301.64,830.42 301.64,868.99 305.29,872.64 334.36,872.64 419,788 457.68,788 471.68,774 v1(472,774)
CON1_USB_P: D4.2 J*1.A6 J*1.B6 R5.1 | length 583.4
  L1 w6.23: J*1.A6 181.02,814.84 177.37,811.19 177.37,779.12 181.02,775.47 J*1.B6 262.47,775.47 272,785 D4.2 301,801.23 286.15,816.08 v1(282.57,816.08) ; v1(470,825) 498.98,825 R5.1
  L4 w6.23: v1(282.57,816.08) 285.97,819.48 285.97,827.17 287.41,828.62 287.41,874.89 299.4,886.87 340.25,886.87 424.89,802.23 452.04,802.23 470,820.19 v1(470,825)
CON2_USB_N: D7.2 J*2.A7 J*2.B7 R24.1 | length 1937.2
  L1 w6.23: J*2.A7 229.69,245 189.65,245 186,248.65 186,280.88 189.65,284.53 J*2.B7 261.47,284.53 282,264 D7.2 323.92,264 333.88,254.05 435.05,254.05 v1(444,263) ; v1(1853,510) 1871,528 R24.1
  L4 w6.23: v1(444,263) 446.65,263 456.53,253.11 710.13,253.11 869.25,412.23 1149.11,412.23 1189.11,452.23 1419.23,452.23 1462.3,495.3 1839.61,495.3 1853,508.69 v1(1853,510)
CON2_USB_P: D8.2 J*2.A6 J*2.B6 R25.1 | length 1873.2
  L1 w6.23: J*2.B6 261.47,225.47 269,233 ; J*2.A6 261.03,264.84 272.94,252.94 272.94,236.94 269,233 ; v1(445,229) 434.18,239.82 331.74,239.82 324.92,233 D8.2 269,233 ; v1(1855.63,466.37) 1869,453 R25.1
  L4 w6.23: v1(445,229) 447.65,229 457.53,238.89 716.02,238.89 875.14,398 1155,398 1195,438 1425.13,438 1468.19,481.07 1839.61,481.07 1854.31,466.37 v1(1855.63,466.37)
CON_ESP_USB_N: J1.21 R26.1 | length 1752.4
  L1 w6.23: J1.21 669.24,55 672.89,58.65 672.89,76.48 763.94,167.54 763.94,190.06 v1(762,192) ; R26.1 v1(2009.98,528)
  L4 w6.23: v1(762,192) 762,193.65 772.89,204.53 772.89,254.89 873.54,355.54 1261.94,355.54 1295.39,389 1778,389 1809,420 1900.39,420 1976.49,496.1 2041.35,496.1 2045,499.75 v1(2045,527) ; v1(2009.98,528) v1@2045,528
CON_ESP_USB_P: J1.20 R27.1 | length 1741.4
  L1 w6.23: J1.20 690.76,55 687.11,58.65 687.11,70.59 794.9,178.37 794.9,189.9 v1(798,193) ; R27.1 v1(2004,453)
  L4 w6.23: v1(798,193) 798,194.65 787.11,205.53 787.11,248.99 879.44,341.31 1267.83,341.31 1301.29,374.77 1783.89,374.77 1814.89,405.77 1906.29,405.77 1982.39,481.87 2042.87,481.87 2047,477.74 2047,452 2046,453 v1(2004,453)
CON_GPIO0: J2.3 R21.1 | length 551.9
  L1 w6: R21.1 1954.99,904.14 1960.85,910 2340,910 J2.3
DTR_FTDI: Q2.2 R16.1 U*1.18 | length 455.6
  L1 w6: U*1.18 865,800 929,736 929,701.86 937.86,693 R16.1 1028.69,737.69 1028.69,770.97 1035.08,777.36 1068.36,777.36 1082.32,791.32 1082.32,808.09 1075.81,814.6 Q2.2
ESP_USB_N: R24.2 R26.2 u*2.23 | length 184.1
  L1 w6.23: R24.2 1943,505.96 1946.65,502.31 2082.54,502.31 2086.19,505.96 2086.19,507.17 2090.94,511.93 u*2.23
ESP_USB_P: R25.2 R27.2 u*2.24 | length 191.1
  L1 w6.23: R25.2 1948.5,460.51 1948.5,484.43 1952.15,488.08 2082.54,488.08 2086.19,484.43 2086.19,483.22 2090.94,478.46 u*2.24
FTDI_RESET: c8.2 R7.2 U*1.11 | length 165.2
  L1 w6: R7.2@578.06,642.96 630.32,642.96 c8.2 626.4,646.89 626.4,685.14 632.25,691 648.35,691 670.63,713.28 U*1.11
FTDI_USB_N: R4.2 U*1.9 | length 115.6
  L1 w6.23: R4.2 542.51,779.51 542.51,786.74 546.16,790.39 586.1,790.39 593.44,783.04 619.21,783.04 621.93,780.32 U*1.9
FTDI_USB_P: R5.2 U*1.8 | length 115.6
  L1 w6.23: R5.2 542.51,815.49 542.51,808.26 546.16,804.61 591.99,804.61 599.34,797.27 619.21,797.27 621.93,800 U*1.8
GND: c1.1 c2.1 c3.1 c4.1 c5.1 c6.1 c7.2 c8.1 c9.1 c10.1 C11.1 C12.1 C13.1 c14.1 c15.1 c16.1 C17.1 D1.1 D2.1 D3.1 D4.1 D6.1 D7.1 D8.1 J1.2 J1.24 J2.1 J2.23 J*1.A1B12 J*1.B1A12 J*1.S1 J*1.S2 J*1.S3 J*1.S4 J*2.A1B12 J*2.B1A12 J*2.S1 J*2.S2 J*2.S3 J*2.S4 R10.2 R11.2 R12.1 R13.1 R14.1 R15.1 SW1.3 SW1.4 SW2.3 SW2.4 U1.2 U1.4 U*1.3 U*1.13 U*1.21 u*2.1 u*2.2 u*2.42 u*2.43 u*2.46 u*2.47 u*2.48 u*2.49 u*2.50 u*2.51 u*2.52 u*2.53 u*2.54 u*2.55 u*2.56 u*2.57 u*2.58 u*2.59 u*2.60 u*2.61 u*2.62 u*2.63 u*2.64 u*2.65 u*2.66 u*2.67 u*2.68 u*2.69 u*2.70 u*2.71 u*2.72 u*2.73 | length 4425.4
  L1 w6: u*2.42@2508.06,241.39 v1@2508.06,293.94 ; u*2.43@2542.06,241.39 v1@2542.06,293.94 ; u*2.2@2575.94,794.61 2575.6,794.27 2575.6,744.4 v1(2576,744) ; v1@2603.06,512.06 u*2.53@2655.61,512.06 ; v1@2603.06,546.06 u*2.54@2655.61,546.06 ; v1@2603.06,579.06 u*2.55@2655.61,579.06 ; v1@2603.06,613.06 u*2.56@2655.61,613.06 ; v1@2603.06,646.06 u*2.57@2655.61,646.06 ; v1@2603.06,679.06 u*2.58@2655.61,679.06 ; v1@2603.06,713.06 u*2.59@2655.61,713.06 ; v1@2603.06,746.06 u*2.60@2655.61,746.06 ; v1@2604.06,278.06 u*2.46@2656.61,278.06 ; v1@2604.06,311.06 u*2.47@2656.61,311.06 ; v1@2604.06,345.06 u*2.48@2656.61,345.06 ; v1@2604.06,378.06 u*2.49@2656.61,378.06 ; v1@2604.06,412.06 u*2.50@2656.61,412.06 ; v1@2604.06,445.06 u*2.51@2656.61,445.06 ; v1@2604.06,478.06 u*2.52@2656.61,478.06
  L1 w10.01: U*1.13 710.23,724.35 710.23,699.77 v1(718,692)
  L1 w12: D7.1 319.89,290.48 347.23,290.48 355.75,299 v1(359,299) ; D8.1 324.92,207.41 342.03,190.3 350.7,190.3 v1(353,188) ; R15.1 450.98,285.98 466,301 v1(466,304) v1@467,305 ; c10.1 414.28,370.43 448.41,336.3 454.7,336.3 v1(457,334)
  L1 w15: J*1.B1A12 240.67,679.02 v1(258.84,660.84) ; J*1.A1B12 276,931 v1(277,932) ; v1(285,458) 302.41,440.59 D6.1 ; v1(285,620) 285,659.09 296.2,670.3 D2.1 ; D3.1 311.8,880.8 v1(333,902) ; D4.1 329.41,759.41 v1(336,766) ; R12.1 409.13,765.87 427.13,765.87 442,751 v1(443,751) ; R13.1@407.18,822.98 R13.1@410.31,826.11 ; R13.1@413.57,827.31 v1@436,827.31 ; c3.1 432.57,668.43 461,639.99 v1(461,631) ; v1@454,899 v1(455,898) c9.1 ; v1(463,716) c6.1 ; c8.1 631,572.72 v1(632,571.72) ; v1(698,923) 710,911 U*1.3 ; c1.1 748.57,579.43 770.99,557 v1(779,557) ; c2.1 748.57,641.43 765.27,624.72 779.28,624.72 v1(781,623) ; R10.2 909,545 v1(917,537) ; R11.2 909.56,596 919.56,586 v1(922,586) ; SW1.4 v1(1243.5,414.5)
  L1 w20: J*2.B1A12 289.02,129.02 v1@292,132 ; J*2.A1B12 240.83,381 259,399.17 v1(259,429) ; R14.1 417.87,198.13 445.87,198.13 v1(470.24,173.76) ; v1(526,279) v1(566,279) ; C13.1 536,249 v1(566,279) ; C12.1@596,220 596,268.92 606,278.92 v1(606,280) ; C11.1 602,285.08 606,281.08 v1(606,280) ; U1.2 v1(606,280) ; c7.2 924,848 v1(938,862) ; U1.4 U1.4@911.06,303.46 ; U1.4@915,319 911.06,315.06 U1.4@911.06,303.46 ; v1(993,322) 929.61,322 U1.4@911.06,303.46 ; SW2.4 1312.42,888.58 v1(1320,881) ; SW1.3 1556.5,404.5 v1(1569,417) ; SW2.3 1555,887.09 1555,854 1563,846 v1(1567,846) ; v1(1611,188) 1627,204 1655.43,204 1656.43,205 c16.1 ; v1(1629,690) 1630.08,690 1647.2,707.12 1670.83,707.12 1673.43,709.72 C17.1 ; v1(1712,215) 1721,206 D1.1 ; v1(2024,771) 2040.52,787.52 u*2.63 ; v1(2045,224) 2057.34,236.34 u*2.64 ; v1(2256.89,576.89) u*2.71 ; v1(2257.71,449.11) u*2.73@2310.27,449.11 ; v1(2258.71,516.11) u*2.72@2311.27,516.11 ; v1(2342,545) 2342,544.34 u*2.61 ; v1(2343,479) 2343.77,479.77 2343.77,481.28 u*2.61 ; v1(2373.89,391.71) u*2.70@2373.89,444.27 ; u*2.69@2374.11,576.89 v1(2374.11,619.29) ; v1(2408,545) 2407.48,545 u*2.61 ; v1(2409,479) 2408.23,479.77 2406.57,479.77 u*2.61 ; v1(2420,936) 2420,934.92 2433.29,921.63 c14.1@2433.29,886.57 ; 2424.73,579.89 v1(2477.29,579.89) ; u*2.67@2436.73,514.89 v1(2489.29,514.89) ; u*2.68@2437.73,449.89 v1(2490.29,449.89) ; J1.2 2541.69,55 2595.43,108.74 c5.1 ; c15.1@2554,885 2554,883.43 2578,859.43 v1(2578,836) 2611,836 ; u*2.1 2608.66,833.66 2611,836 ; J2.1 2630,934 2638.57,925.43 c4.1 ; v1(2640,189) 2650,199 u*2.65 ; u*2.62 2644.25,793.27 2644.25,819.75 2628,836 2611,836 ; v1(566,279) 566.5,279.5 605.5,279.5 v1(606,280)
  other v1: 290.51,130.51 817,172 735,176 2604,278 2508,294 2542,294 2604,311 1060,321 1029,322 1092,322 1121,322 2604,345 2604,378 1059,381 992,382 1028,382 1091,382 1120,382 2604,412 1057,442 990,443 1026,443 1089,443 1118,443 2604,445 1789,456 2604,478 2603,512 1789,513 2603,546 2603,579 2603,613 2603,646 2603,679 2603,713 2603,746 689,784 730,786 689,820 729,820 436,826
GPIO0: R21.2 R23.2 u*2.4 | length 667.2
  L1 w6: R23.2 R21.2 1994,871.99 1994,887.14 1999.86,893 2232.93,893 2271.93,854 2499.14,854 2508.27,844.87 u*2.4
GPIO1: J2.4 u*2.5 | length 375.7
  L1 w6: u*2.5 2474.9,787.42 2474.9,736.1 v1(2475,736)
  L4 w6: J2.4 2475,855 v1(2475,736)
GPIO2: D5.1 J2.5 u*2.6 | length 1644.9
  L1 w6: v1(1645,854) 1666,875 D5.1 1701,910.8 1721.2,931 2161,931 J2.5 ; u*2.6 2441.34,694.66 v1(2444,692)
  L4 w6: v1(1645,854) 1904,854 2085,673 2385,673 2404,692 v1(2444,692)
GPIO3: J2.6 u*2.7 | length 499.7
  L1 w6: v1(2408,735) 2407.94,735.06 2407.94,787.61 u*2.7@2408,787.67
  L4 w6: J2.6 2177,953 2291,953 2408,836 v1(2408,735)
GPIO4: J2.7 u*2.8 | length 653.5
  L1 w6: v1(2374,693) 2374.41,693.41 u*2.8
  L4 w6: J2.7 2071,959 2140,959 2164,935 2281,935 2374.41,841.59 2374.41,693.41 v1(2374,693)
GPIO5: J2.8 u*2.9 | length 637.9
  L1 w6: v1@2340.94,736.06 u*2.9@2340.94,788.61
  L4 w6: J2.8 1976,954 2051,954 2070.5,934.5 2140.5,934.5 2159,916 2272,916 2341,847 v1(2341,736)
GPIO6: J2.9 u*2.10 | length 791.3
  L1 w6: v1(2307.41,694.41) u*2.10@2307.41,788.52
  L4 w6: J2.9 1874,956 1945,956 1965,936 2044,936 2063,917 2133,917 2153,897 2264,897 2307.41,853.59 v1(2307.41,694.41)
GPIO7: J2.10 u*2.11 | length 777.6
  L1 w6: v1@2273.94,734.06 u*2.11@2273.94,786.61
  L4 w6: J2.10 1787,943 1940,943 1964,919 2038,919 2056,901 2124,901 2144,881 2248,881 2274,855 v1(2274,734)
GPIO8: J2.11 u*2.12 | length 917
  L1 w6: v1(2240.41,692.41) u*2.12@2240.41,786.52
  L4 w6: J2.11 1704,926 1925,926 1947,904 2026,904 2043,887 2113,887 2135,865 2213,865 2240.41,837.59 v1(2240.41,692.41)
GPIO9: J2.12 u*2.13 | length 903.2
  L1 w6: v1@2206.94,735.06 u*2.13@2206.94,787.61
  L4 w6: J2.12 1620,910 1917,910 1938,889 2015,889 2036,868 2108,868 2126,850 2201.14,850 2207,844.14 v1(2207,735)
GPIO10: J2.13 u*2.14 | length 1040.5
  L1 w6: v1(2173.41,693.41) u*2.14@2173.41,787.52
  L4 w6: J2.13 1534,896 1909,896 1929,876 2009,876 2029,856 2094,856 2121,829 2167.55,829 2173.41,823.14 v1(2173.41,693.41)
GPIO11: J2.14 u*2.15 | length 1005.2
  L1 w6: v1(2140,735) 2140.08,735.08 2140.08,787.44 u*2.15
  L4 w6: J2.14 1450,880 1897,880 1915,862 2001,862 2025,838 2093,838 2140,791 v1(2140,735)
GPIO12: J2.15 u*2.16 | length 976.5
  L1 w6: v1@1955,748 v1(1956.82,746.18) u*2.16
  L4 w6: J2.15 1403,827 1730,827 1772,785 1918,785 v1(1956.82,746.18)
GPIO13: J2.16 u*2.17 | length 1088.2
  L1 w6: v1@1873,713 v1(1873.28,712.72) u*2.17
  L4 w6: J2.16 1130.14,999.86 1171.14,999.86 1359,812 1724,812 1823.28,712.72 v1(1873.28,712.72)
GPIO14: J2.17 u*2.18 | length 1202.7
  L1 w6: v1(1929,678) 1930.25,679.25 u*2.18
  L4 w6: J2.17 1031.14,998.86 1071.14,998.86 1271,799 1717,799 1838,678 v1(1929,678)
GPIO15: J2.18 u*2.19 | length 1315.5
  L1 w6: v1(1877,646) 1877.21,645.79 u*2.19
  L4 w6: J2.18 973,1000 1188,785 1712,785 1834.18,662.82 1856.39,662.82 1873.21,646 v1(1877,646)
GPIO16: J2.19 u*2.20 | length 1436.4
  L1 w6: v1(1808,648) 1843.68,612.32 u*2.20
  L4 w6: J2.19 868.5,961.5 979.5,961.5 1172,769 1699,769 1805.32,662.68 1805.32,650.68 v1(1808,648)
GPIO17: J2.20 u*2.21 | length 1572
  L1 w6: v1(1759,636) 1802,593 2042,593 2056.14,578.86 u*2.21
  L4 w6: J2.20 730.14,999.86 771.14,999.86 821,950 942.2,950 1137.2,755 1689,755 1759,685 v1(1759,636)
GPIO18: J2.21 u*2.22 | length 2046.7
  L1 w6: v1(1716,663) 1718.68,660.32 1718.68,636.32 1779,576 2034,576 2048,562 2075.21,562 2088.07,549.14 2088.07,548.27 2090.94,545.39 u*2.22
  L4 w6: J2.21 562,932 562,641 602,601 791.09,601 824.09,568 1216.05,568 1236.9,588.86 1628.86,588.86 v1@1705,665
GPIO21: J1.19 u*2.25 | length 1430.5
  L1 w6: v1(1948,383) 1976,411 2057.21,411 2088.07,441.86 2088.07,442.13 2090.94,445 u*2.25
  L4 w6: J1.19 874,55 927,108 1087,108 1135,156 1319,156 1493,330 1895,330 v1(1948,383)
GPIO26: J1.18 u*2.26 | length 1316.5
  L1 w6: v1(2000,391) 2070.41,391 2090.94,411.54 u*2.26
  L4 w6: J1.18 938.23,63.23 968.23,63.23 1000,95 1093,95 1141,143 1323,143 1496,316 1925,316 v1(2000,391)
GPIO33: J1.17 u*2.28 | length 1188.8
  L1 w6: v1(1975,319) 2000.61,344.61 u*2.28
  L4 w6: J1.17 1039.73,64.73 1079.73,64.73 1142,127 1326,127 1502,303 1959,303 v1(1975,319)
GPIO34: J1.16 u*2.29 | length 1074.9
  L1 w6: v1(2010,308) 2011.57,309.57 2097.25,309.57 u*2.29
  L4 w6: J1.16 1137.82,55 1193.82,111 1335,111 1513,289 1991,289 v1(2010,308)
GPIO35: J1.15 u*2.31 | length 1123.5
  L1 w6: u*2.31@2140.44,241.94 v1(2140.44,336.05)
  L4 w6: J1.15 1230,59.3 1265.7,95 1346,95 1523,272 2076.39,272 v1(2140.44,336.05)
GPIO36: J1.14 u*2.32 | length 994.8
  L1 w6: u*2.32@2173.06,241.39 v1@2173.06,293.94 ; u*2.32 u*2.32@2173.81,236.53
  L4 w6: J1.14 1520,245 2124,245 v1(2173,294)
GPIO37: J1.13 u*2.33 | length 1063.6
  L1 w6: u*2.33@2206.59,241.48 v1(2206.59,335.59)
  L4 w6: J1.13 1589,214 1623,214 1647,190 2158,190 2206.59,238.59 v1(2206.59,335.59)
GPIO38: J1.12 u*2.34 | length 902.7
  L1 w6: v1(2239.39,294.61) 2239.97,294.03 2239.97,242.91 u*2.34@2240.28,242.61
  L4 w6: J1.12 1577,55 1692,170 2161,170 2202,211 2227,211 2236.71,220.71 2236.71,291.93 v1(2239.39,294.61)
GPIO39: J1.11 u*2.35 | length 936.1
  L1 w6: u*2.35 v1(2274,335)
  L4 w6: J1.11 1728,153 2169,153 2213,197 2268.14,197 2274,202.86 v1(2274,335)
GPIO40: J1.10 u*2.36 | length 790.7
  L1 w6: u*2.36@2307.06,241.39 v1@2307.06,293.94
  L4 w6: J1.10 1772,55 1855,138 2176,138 2220,182 2301.14,182 2307,187.86 v1(2307,294)
GPIO41: J1.9 u*2.37 | length 805.9
  L1 w6: u*2.37@2340.59,241.48 v1(2340.59,335.59)
  L4 w6: J1.9 1899,124 2183,124 2228,169 2319,169 2340.59,190.59 v1(2340.59,335.59)
GPIO42: J1.8 u*2.38 | length 648.7
  L1 w6: u*2.38@2375.06,241.39 v1@2375.06,293.94
  L4 w6: J1.8 1985,110 2190,110 2235,155 2325,155 2375,205 v1(2375,294)
GPIO45: J1.5 u*2.41 | length 518.7
  L1 w6: u*2.41 v1(2474.8,333.8)
  L4 w6: J1.5 2285,110 2355,110 2474.8,229.8 v1(2474.8,333.8)
GPIO46: J1.4 u*2.44 | length 352
  L1 w6: J1.4 2421,146 2539,146 2575.2,182.2 u*2.44
GPIO47: J1.23 u*2.27 | length 1837.8
  L1 w6: v1(1832,378) 1853,399 1896,399 1938.5,356.5 2014.5,356.5 2036.07,378.07 u*2.27
  L4 w6: J1.23 432,57 477,57 517,97 601,97 614,110 890,110 915,135 1079,135 1124,180 1304,180 1483,359 1813,359 v1(1832,378)
GPIO48: J1.22 u*2.30 | length 1765.7
  L1 w6: v1(1878,375) 1878,334 1934.32,277.68 u*2.30
  L4 w6: J1.22 576,55 619,98 896,98 920,122 1083,122 1129,168 1309,168 1488,347 1850,347 v1(1878,375)
NetD1_2: D1.2 R6.1 | length 68.3
  L1 w6: D1.2 1757.81,236.59 1768.47,236.59 1774.33,230.73 1774.33,218.47 1780.19,212.61 1791.37,212.61 R6.1
NetD5_2: D5.2 R9.1 | length 77
  L1 w6: D5.2 1701.4,838 1721.14,838 1727,843.86 1727,862.3 1732.86,868.16 1750.5,868.16 R9.1
NetJ*1_A5: J*1.A5 R13.2 | length 254
  L1 w6: J*1.A5 230.75,855.12 252.12,855.12 276,879 276,891 283,898 295,898 319,922 368,922 404,886 404,859 R13.2
NetJ*1_B5: J*1.B5 R12.2 | length 176.6
  L1 w6: J*1.B5 230.4,735.54 405.44,735.54 R12.2
NetJ*2_A5: J*2.A5 R15.2 | length 185.7
  L1 w6: J*2.A5 292.21,304.21 305,317 406,317 R15.2
NetJ*2_B5: J*2.B5 R14.2 | length 197.7
  L1 w6: 305.9,186.1 329,163 415.5,163 R14.2
  L1 w15: J*2.B5 305.9,186.1
NetQ1_1: Q1.1 R16.2 | length 140.7
  L1 w6: R16.2 988.33,663.32 1003.32,663.32 1072.22,732.22 Q1.1
NetQ2_1: Q2.1 R18.2 | length 87.2
  L1 w6: R18.2 987.49,893.51 1070.51,893.51 Q2.1@1072,895
NetR10_1: R10.1 U*1.15 | length 227.8
  L1 w6: U*1.15 749.37,713.28 801,661.65 801,566.86 816.05,551.81 834.35,551.81 839.98,546.18 R10.1
RTS_FTDI: Q1.2 R18.1 U*1.19 | length 527.8
  L1 w6: U*1.19 946.5,819.68 984.82,858 R18.1 1078.88,858 1112,824.88 1112,702.63 1088.97,679.6 Q1.2
RXD_FTDI: R22.2 U*1.1 | length 1788.5
  L1 w6: v1(730,924) 732.68,921.32 732.68,903.41 749.37,886.72 U*1.1 ; v1(1603,669) 1603,542 1980,165 R22.2